# EAGLE board CFA_old (EAGLE 9.3.1)
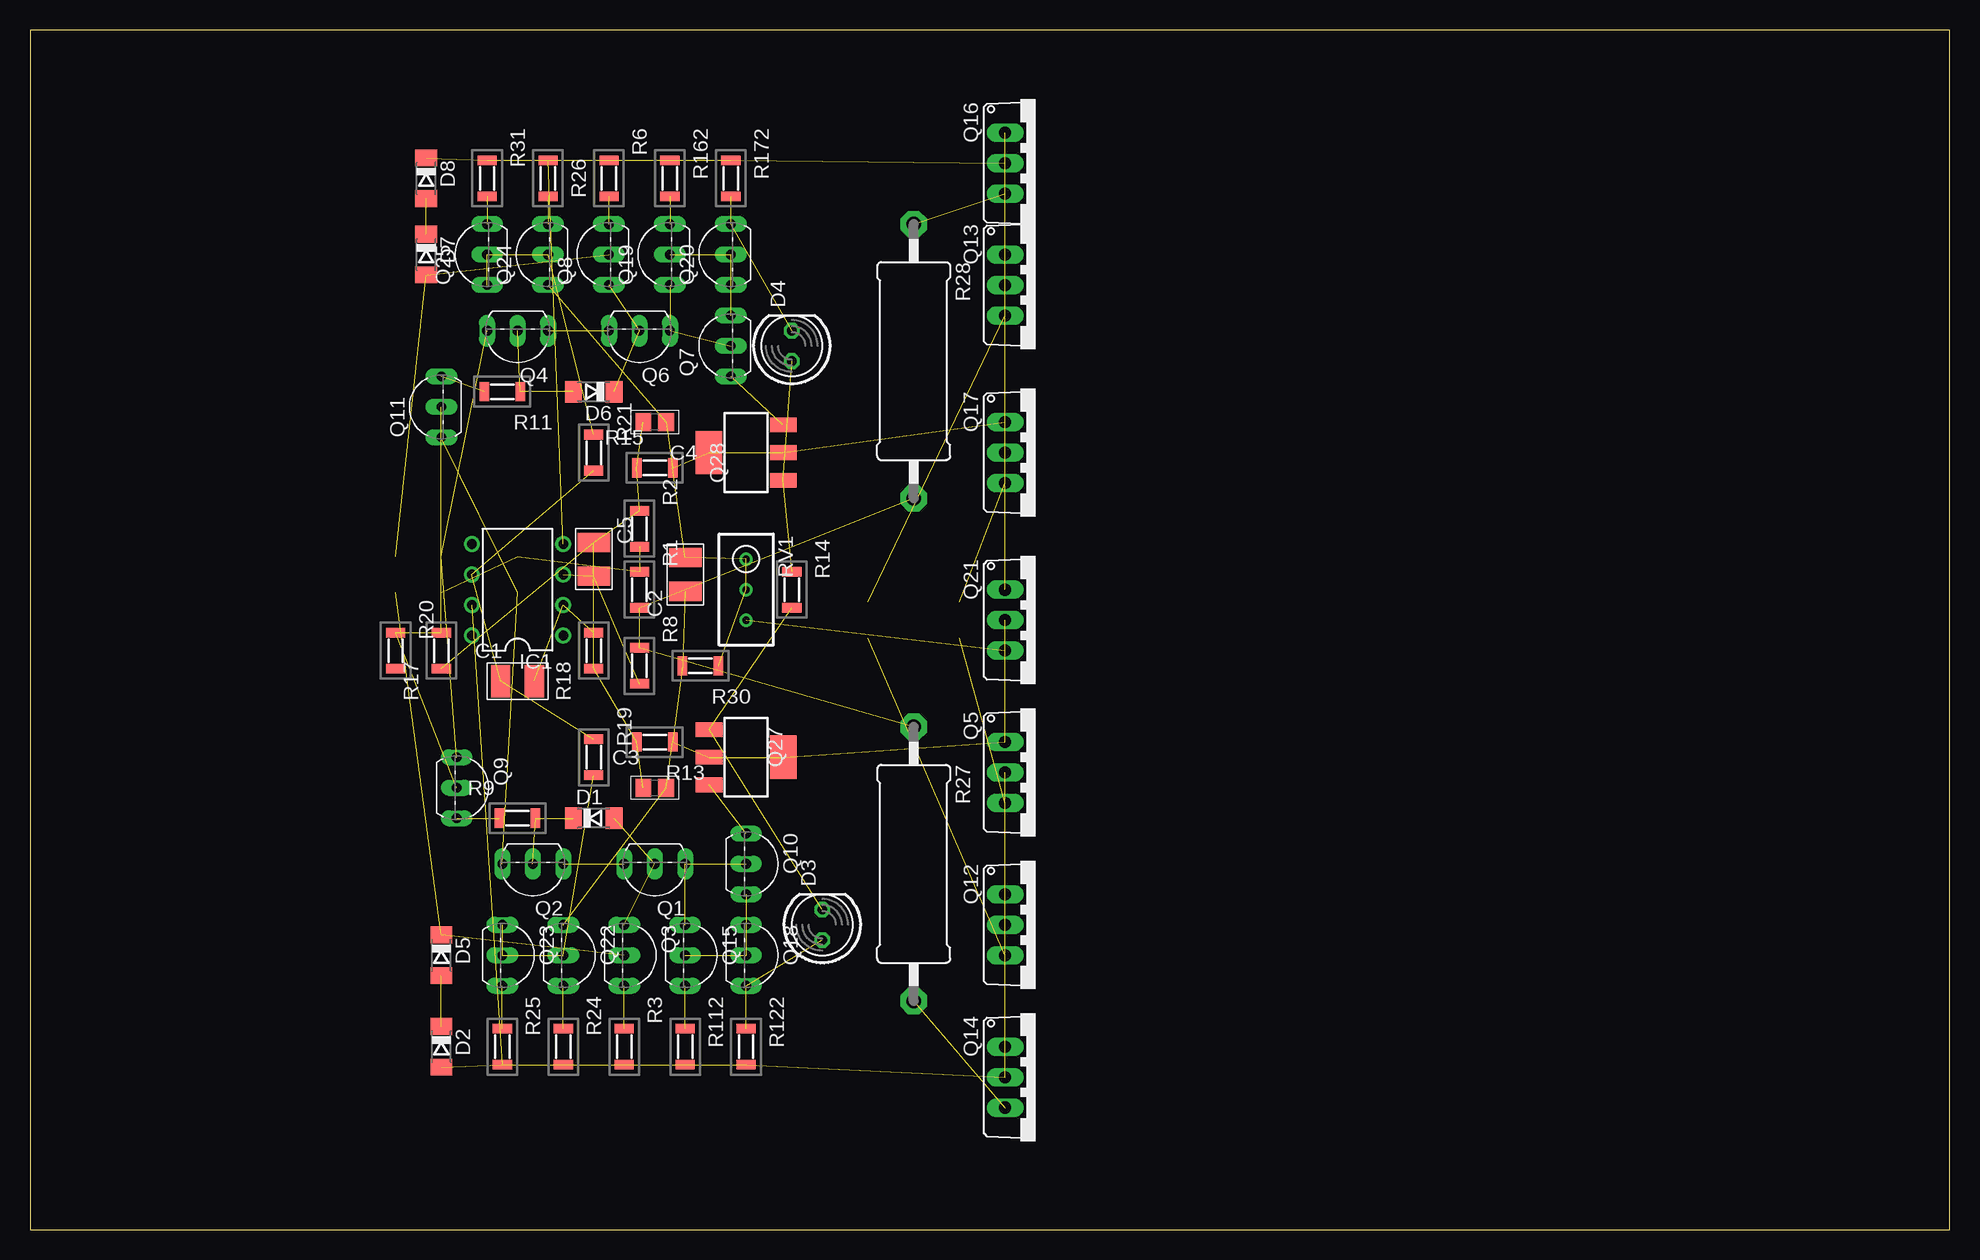
[diagram p0: board, top side]
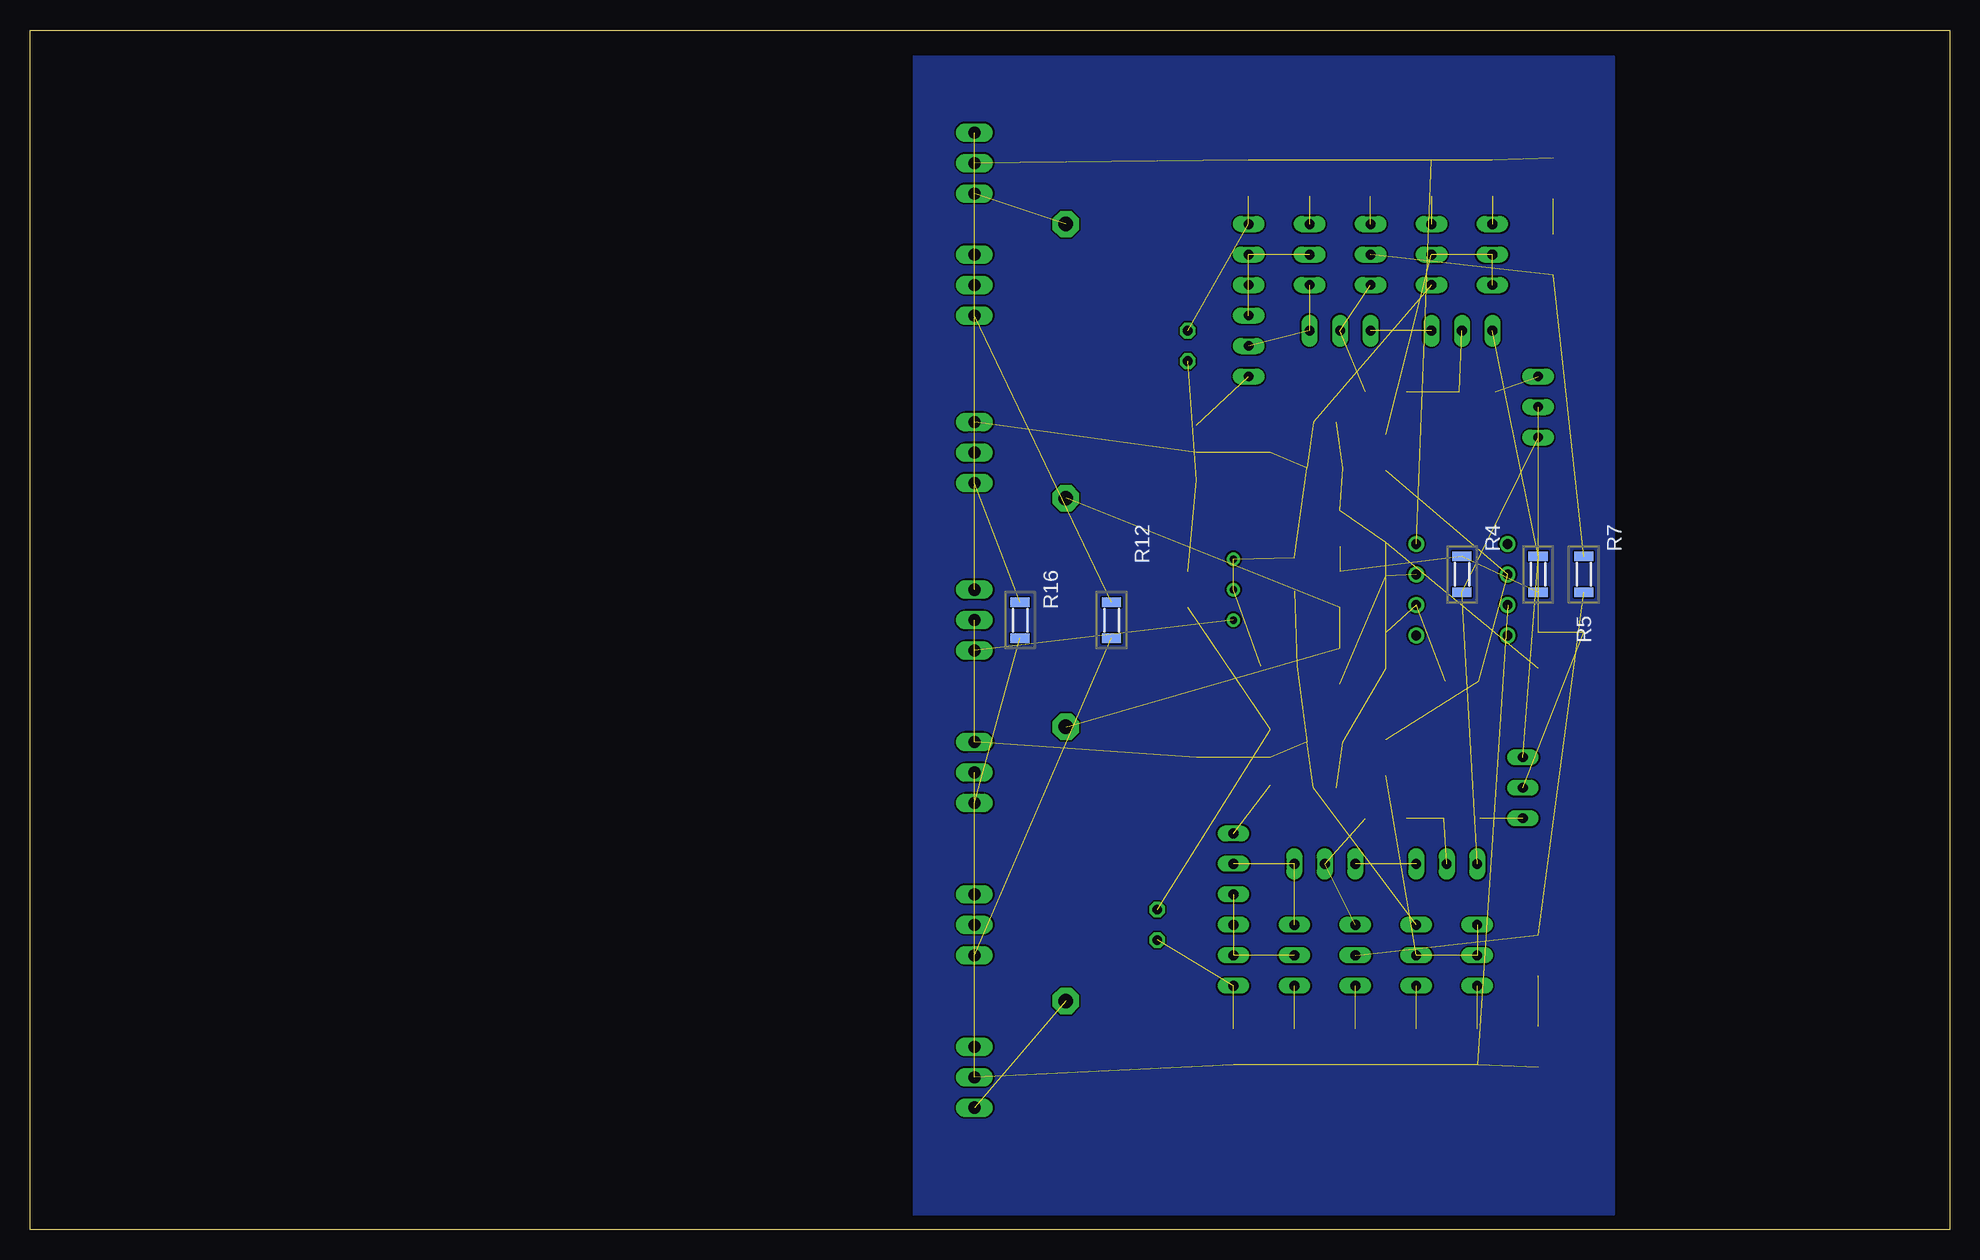
[diagram p1: board, bottom side, seen from below]

Size 160 x 100 mm. Coordinates in mm from the lower left corner, seen from the top.
Outline: 0,0 160,0 160,100 0,100 0,0
Copper layers (1*16): Top 0.035mm / dielectric 1.5mm / Bottom 0.035mm
Design rules "default": minimum track width 6mil, minimum drill 0.35mm, track to track 6mil, track to pad 6mil, pad to pad 6mil, via to via 6mil, smd to smd 6mil, copper to edge 40mil, drill to drill 6mil, minimum pad ring 10mil, minimum via ring 8mil, stop-mask expansion 4mil, vias tented up to drill 0mil, thermal gap 10mil

## Footprints (pad centres in the part's own frame; a part is rotated, then mirrored left to right if it is on the bottom)
C1210 = smd 1.6 x 2.7: 1 -1.4,0; 2 1.4,0
C0805 = smd 1.3 x 1.5: 1 -0.95,0; 2 0.95,0
SOD80C = smd 1.4 x 1.8: A 1.7,0; C -1.7,0
LED5MM = drill 0.813 octagon: A -1.27,0; K 1.27,0
DIL08 = drill 0.813 pad 1.27: 1 -3.81,-3.81; 2 -1.27,-3.81; 3 1.27,-3.81; 4 3.81,-3.81; 5 3.81,3.81; 6 1.27,3.81; 7 -1.27,3.81; 8 -3.81,3.81
TO92-EBC = drill 0.813 long: B 0,-1.27; C -2.54,-1.27; E 2.54,-1.27
TO220AV = drill 1.016 long: B -2.54,-2.54; C 0,-2.54; E 2.54,-2.54
SOT223 = smd 1.219 x 2.235: 1 -2.311,-3.099; 2 0,-3.099; 3 2.311,-3.099 | smd 3.6 x 2.2: 4 0,3.099
MINI_MELF-0204R = smd 0.8 x 1.6: 1 -1.5,0; 2 1.5,0
0617/22 = drill 1.2 pad 2.184 octagon: 1 -11.43,0; 2 11.43,0
RTRIM3296W = drill 0.61: 1 0,-2.54; 2 0,0; 3 0,2.54

## Placement (x,y rotation side)
C1  4uF  [C1210]  40.64,45.72 0 top
C2  47u  [C1210]  54.61,54.61 90 top
C3  150pf  [C0805]  52.07,36.83 0 top
C4  150pf  [C0805]  52.07,67.31 180 top
C5  4uF  [C1210]  46.99,55.88 270 top
D1  [SOD80C]  46.99,34.29 0 top
D2  [SOD80C]  34.29,15.24 270 top
D3  [LED5MM]  66.04,25.4 90 top
D4  [LED5MM]  63.5,73.66 90 top
D5  [SOD80C]  34.29,22.86 270 top
D6  [SOD80C]  46.99,69.85 180 top
D7  [SOD80C]  33.02,81.28 270 top
D8  [SOD80C]  33.02,87.63 270 top
IC1  OPA345P  [DIL08]  40.64,53.34 90 top
Q1  BC550C  [TO92-EBC]  52.07,29.21 180 top
Q2  BC550C  [TO92-EBC]  41.91,29.21 180 top
Q3  BC560C  [TO92-EBC]  50.8,22.86 270 top
Q4  BC560C  [TO92-EBC]  40.64,73.66 180 top
Q5  MJE15030  [TO220AV]  83.82,38.1 270 top
Q6  BC560C  [TO92-EBC]  50.8,73.66 180 top
Q7  BC550C  [TO92-EBC]  57.15,73.66 90 top
Q8  BC550C  [TO92-EBC]  46.99,81.28 90 top
Q9  BC560C  [TO92-EBC]  36.83,36.83 270 top
Q10  BC560C  [TO92-EBC]  60.96,30.48 270 top
Q11  BC550C  [TO92-EBC]  33.02,68.58 90 top
Q12  MJE15030  [TO220AV]  83.82,25.4 270 top
Q13  MJE15031  [TO220AV]  83.82,78.74 270 top
Q14  MJE15030  [TO220AV]  83.82,12.7 270 top
Q15  BC560C  [TO92-EBC]  55.88,22.86 270 top
Q16  MJE15031  [TO220AV]  83.82,88.9 270 top
Q17  MJE15031  [TO220AV]  83.82,64.77 270 top
Q18  BC560C  [TO92-EBC]  60.96,22.86 270 top
Q19  BC550C  [TO92-EBC]  52.07,81.28 90 top
Q20  BC550C  [TO92-EBC]  57.15,81.28 90 top
Q21  MJE15030  [TO220AV]  83.82,50.8 270 top
Q22  BC560C  [TO92-EBC]  45.72,22.86 270 top
Q23  BC560C  [TO92-EBC]  40.64,22.86 270 top
Q24  BC550C  [TO92-EBC]  41.91,81.28 90 top
Q25  BC550C  [TO92-EBC]  36.83,81.28 90 top
Q27  PZTA56  [SOT223]  59.69,39.37 270 top
Q28  PZTA06SOT-223  [SOT223]  59.69,64.77 90 top
R1  500  [MINI_MELF-0204R]  50.8,53.34 270 top
R2  200  [MINI_MELF-0204R]  50.8,58.42 270 top
R3  200  [MINI_MELF-0204R]  49.53,15.24 270 top
R4  10  [MINI_MELF-0204R]  40.64,54.61 270 bottom
R5  10  [MINI_MELF-0204R]  34.29,54.61 270 bottom
R6  200  [MINI_MELF-0204R]  48.26,87.63 270 top
R7  100k  [MINI_MELF-0204R]  30.48,54.61 270 bottom
R8  100k  [MINI_MELF-0204R]  50.8,46.99 270 top
R9  10  [MINI_MELF-0204R]  40.64,34.29 0 top
R11  10  [MINI_MELF-0204R]  39.37,69.85 180 top
R12  220  [MINI_MELF-0204R]  69.85,50.8 270 bottom
R13  1M  [MINI_MELF-0204R]  52.07,40.64 180 top
R14  68k  [MINI_MELF-0204R]  63.5,53.34 270 top
R15  1M  [MINI_MELF-0204R]  52.07,63.5 0 top
R16  500  [MINI_MELF-0204R]  77.47,50.8 270 bottom
R17  20k  [MINI_MELF-0204R]  34.29,48.26 90 top
R18  100k  [MINI_MELF-0204R]  46.99,48.26 90 top
R19  5k  [MINI_MELF-0204R]  46.99,39.37 270 top
R20  1k  [MINI_MELF-0204R]  30.48,48.26 270 top
R21  5k  [MINI_MELF-0204R]  46.99,64.77 270 top
R24  100  [MINI_MELF-0204R]  44.45,15.24 270 top
R25  100  [MINI_MELF-0204R]  39.37,15.24 270 top
R26  100  [MINI_MELF-0204R]  43.18,87.63 270 top
R27  1  [0617/22]  73.66,30.48 270 top
R28  1  [0617/22]  73.66,72.39 270 top
R30  7k  [MINI_MELF-0204R]  55.88,46.99 180 top
R31  100  [MINI_MELF-0204R]  38.1,87.63 270 top
R112  560  [MINI_MELF-0204R]  54.61,15.24 270 top
R122  100  [MINI_MELF-0204R]  59.69,15.24 270 top
R162  560  [MINI_MELF-0204R]  53.34,87.63 270 top
R172  100  [MINI_MELF-0204R]  58.42,87.63 270 top
RV1  5k  [RTRIM3296W]  59.69,53.34 180 top

## Library data of the parts
C1-C5 = Vwvwbg; SPICEPREFIX: C
D1 D2 D5-D8 = diode; SPICEPREFIX: D
D3 D4 = led; SPICEPREFIX: D
IC1 = linear; SPICEPREFIX: X
Q1 Q2 Q7 Q8 Q11 Q19 Q20 Q24 Q25 = transistor-npn; SPICEPREFIX: Q
Q3 Q4 Q6 Q9 Q10 Q15 Q18 Q22 Q23 = transistor-pnp; SPICEPREFIX: Q
Q5 Q12-Q14 Q16 Q17 Q21 = transistor-power; SPICEPREFIX: Q
Q27 Q28 = Vwvwbg; SPICEPREFIX: Q
R1-R9 R11-R21 R24-R28 R30 R31 R112 R122 R162 R172 = Vwvwbg; SPICEPREFIX: R
RV1 = resistor; SPICEPREFIX: Z

## Nets
+24V: D2.A IC1.7 Q5.C Q12.C Q14.C R3.2 R24.2 R25.2 R112.2 R122.2
-24V: D8.C IC1.4 Q13.C Q16.C Q17.C R6.1 R26.1 R31.1 R162.1 R172.1
GND: C3.1 C4.2 C5.1 R2.1 R13.2 R15.1 R17.1 R18.1
N$1: Q21.E RV1.3
N$2: Q3.E R3.1
N$3: D1.A Q1.B Q3.C
N$4: D2.C D5.A
N$5: D5.C Q3.B R7.2
N$6: D1.C Q2.B R9.2
N$7: Q1.E Q2.C
N$8: Q2.E Q11.C R4.2
N$9: R1.1 R2.2 R4.1 R5.2
N$10: Q4.E Q9.C R5.1
N$11: Q4.C Q6.E
N$12: D6.A Q4.B R11.1
N$13: D6.C Q6.B Q8.C
N$14: Q8.E R6.2
N$15: D7.A Q8.B R7.1
N$16: D7.C D8.A
N$19: Q9.E R9.1
N$20: Q11.E R11.2
N$21: Q15.E R112.1
N$22: Q9.B Q11.B R17.2 R20.1
N$23: Q1.C Q10.B Q15.C
N$24: Q10.E Q15.B Q18.B Q18.C
N$25: D3.A Q18.E R122.1
N$26: Q10.C Q27.3
N$27: D3.K Q27.1 R14.2
N$28: Q7.E Q19.B Q20.B Q20.C
N$29: D4.K Q20.E R172.2
N$30: Q19.E R162.2
N$31: Q6.C Q7.B Q19.C
N$32: Q7.C Q28.3
N$33: D4.A Q28.1 R14.1
N$35: Q12.E Q14.B R12.2
N$36: C2.1 C3.2 Q5.B Q21.C Q22.C Q27.2 Q27.4 R13.1 R30.2
N$37: Q22.B Q23.B Q23.C R19.2
N$38: Q24.B Q25.B Q25.C R21.1
N$39: Q23.E R25.1
N$40: Q22.E R24.1
N$41: C1.1 IC1.6 R19.1 R21.2
N$42: R1.2 R8.1 R27.1 R28.2
N$43: Q25.E R31.2
N$44: Q24.E R26.2
N$45: Q5.E Q12.B R16.2
N$47: Q13.B Q17.E R16.1
N$48: C2.2 C4.1 Q17.B Q21.B Q24.C Q28.2 Q28.4 R15.2 R30.1 RV1.1 RV1.2
N$50: Q13.E Q16.B R12.1
N$51: Q14.E R27.2
N$52: Q16.E R28.1
N$53: C1.2 IC1.2 R18.2
N$55: C5.2 IC1.3 R8.2

## Tracks (layer width: path | path; a pad name or v marks a point on that pad's centre or on a via)
+24V  (9 unrouted)
-24V  (9 unrouted)
GND  (7 unrouted)
  pour Bottom: 27.94,97.79 86.36,97.79 86.36,1.27 27.94,1.27
N$1  (1 unrouted)
N$2  (1 unrouted)
N$3  (2 unrouted)
N$4  (1 unrouted)
N$5  (2 unrouted)
N$6  (2 unrouted)
N$7  (1 unrouted)
N$8  (2 unrouted)
N$9  (3 unrouted)
N$10  (2 unrouted)
N$11  (1 unrouted)
N$12  (2 unrouted)
N$13  (2 unrouted)
N$14  (1 unrouted)
N$15  (2 unrouted)
N$16  (1 unrouted)
N$19  (1 unrouted)
N$20  (1 unrouted)
N$21  (1 unrouted)
N$22  (3 unrouted)
N$23  (2 unrouted)
N$24  (3 unrouted)
N$25  (2 unrouted)
N$26  (1 unrouted)
N$27  (2 unrouted)
N$28  (3 unrouted)
N$29  (2 unrouted)
N$30  (1 unrouted)
N$31  (2 unrouted)
N$32  (1 unrouted)
N$33  (2 unrouted)
N$35  (2 unrouted)
N$36  (8 unrouted)
N$37  (3 unrouted)
N$38  (3 unrouted)
N$39  (1 unrouted)
N$40  (1 unrouted)
N$41  (3 unrouted)
N$42  (3 unrouted)
N$43  (1 unrouted)
N$44  (1 unrouted)
N$45  (2 unrouted)
N$47  (2 unrouted)
N$48  (10 unrouted)
N$50  (2 unrouted)
N$51  (1 unrouted)
N$52  (1 unrouted)
N$53  (2 unrouted)
N$55  (2 unrouted)